# EAGLE board lamp_brd (EAGLE 6.6.0)
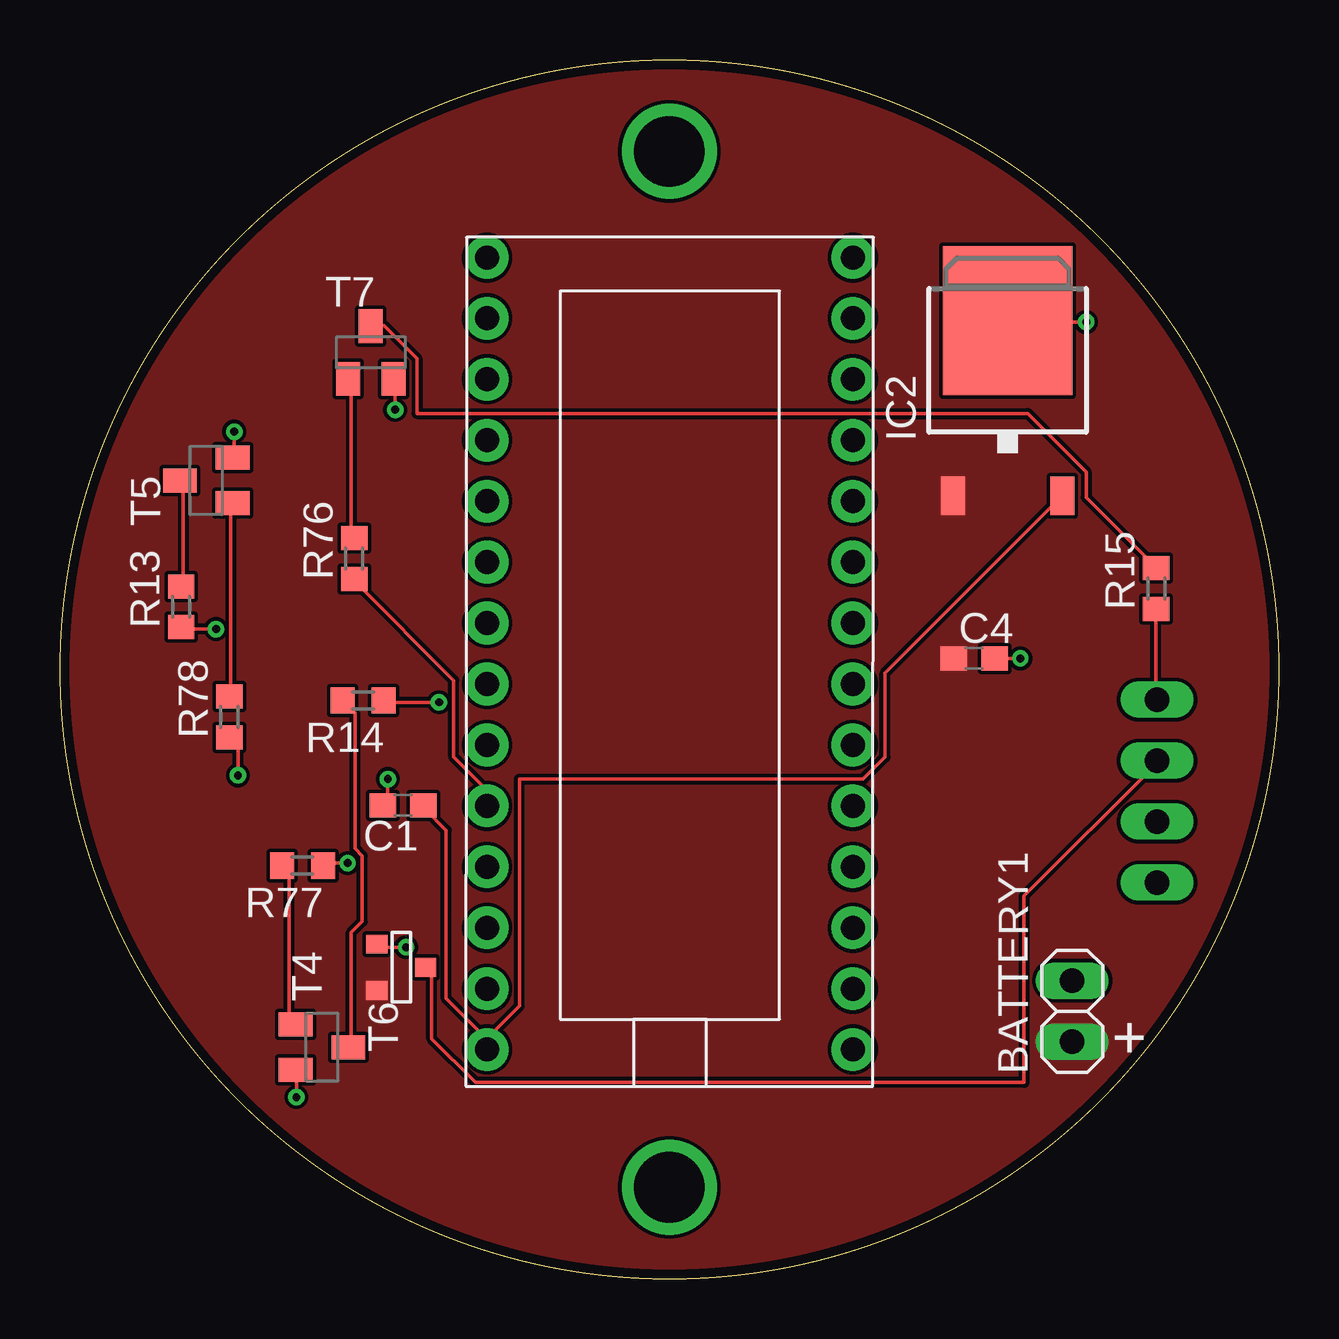
[diagram p0: board, top side]
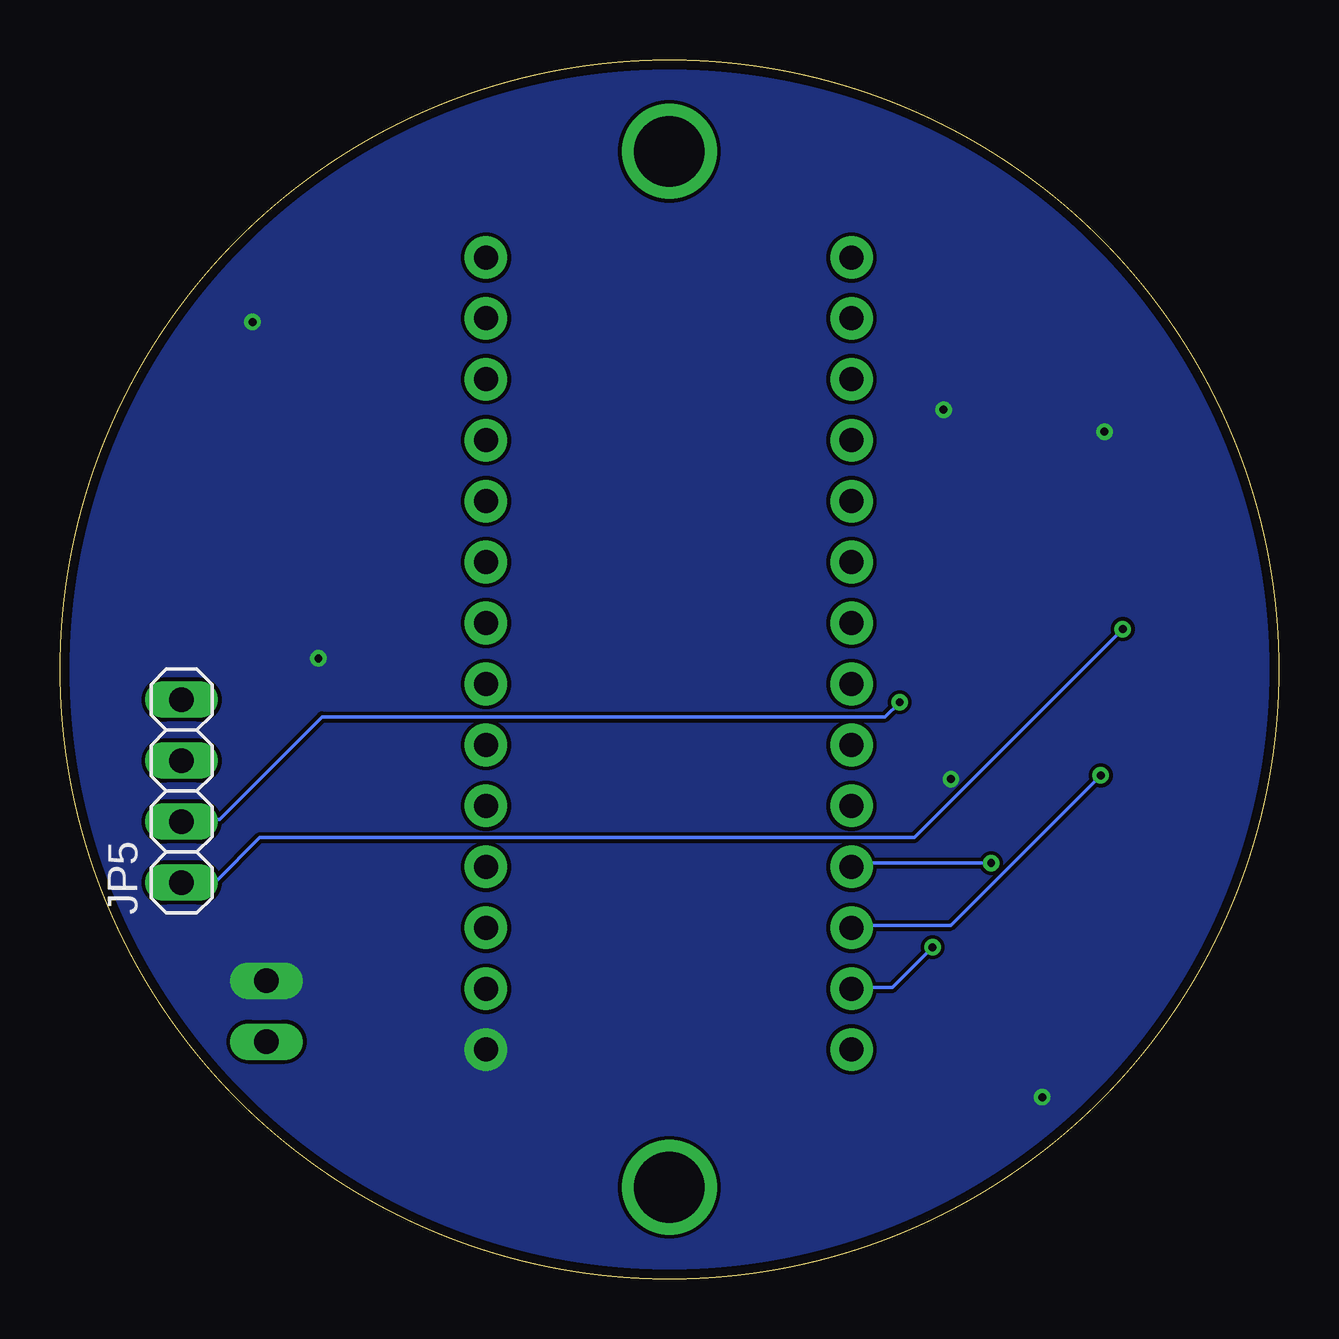
[diagram p1: board, bottom side, seen from below]

Size 50.8 x 50.8 mm. Coordinates in mm from the lower left corner, seen from the top.
Outline: circle at 25.4,25.4 radius 25.4
Copper layers (1*16): Top 0.0356mm / dielectric 1.5011mm / Bottom 0.0356mm
Design rules "LaenPCBOrder": minimum track width 6mil, minimum drill 13mil, track to track 6mil, track to pad 6mil, pad to pad 6mil, via to via 6mil, smd to smd 6mil, copper to edge 15mil, drill to drill 6mil, minimum pad ring 7mil, minimum via ring 7mil, stop-mask expansion 3mil, vias tented up to drill 0mil, thermal gap 10mil

## Footprints (pad centres in the part's own frame; a part is rotated, then mirrored left to right if it is on the bottom)
1X02 = drill 1.016 long: 1 -1.27,0; 2 1.27,0
C0603 = smd 1.1 x 1: 1 -0.85,0; 2 0.85,0
TO252 = smd 1 x 1.6: 1 -2.28,-4.8; 2 2.28,-4.8 | smd 5.4 x 6.2: 3 0,2.5
1X04 = drill 1.016 long: 1 -3.81,0; 2 -1.27,0; 3 1.27,0; 4 3.81,0
R0603 = smd 1 x 1.1: 1 -0.85,0; 2 0.85,0
SOT-23 = smd 0.787 x 0.889: 1 0.025,-1.016; 2 -0.94,1.016; 3 0.991,1.016
SOT23-BEC = smd 1 x 1.4: B -0.95,-1.1; C 0,1.1; E 0.95,-1.1
M2 = drill 1 pad 1.778: AR 0,-17.78; B0 -15.24,-2.54; B1 -15.24,-5.08; B2 -15.24,-7.62; B3 -15.24,-10.16; B4 0,-2.54; B5 0,-5.08; B6 0,-7.62; B7 -15.24,-12.7; C6 0,-10.16; C7 0,-12.7; D0 -15.24,-15.24; D1 -15.24,-17.78; D2 -15.24,-20.32; D3 -15.24,-22.86; D4 -15.24,-25.4; D5 -15.24,-27.94; D6 -15.24,-30.48; D7 -15.24,-33.02; E6 0,-15.24; F0 0,-20.32; F1 0,-22.86; F4 0,-25.4; F5 0,-27.94; F6 0,-30.48; F7 0,-33.02; GND -15.24,0; V+ 0,0

## Placement (x,y rotation side)
BATTERY1  [1X02]  42.19,11.15 90 top
C1  1uF  [C0603]  14.3,19.74 180 top
C4  1uF  [C0603]  38.1,25.86 0 top
IC2  7805DT  [TO252]  39.5,37.44 0 top
JP5  [1X04]  45.73,20.32 90 bottom
R13  390  [R0603]  5.05,28.01 90 top
R14  390  [R0603]  12.63,24.1 180 top
R15  390  [R0603]  45.69,28.77 90 top
R76  390  [R0603]  12.27,30.02 90 top
R77  390  [R0603]  10.11,17.22 180 top
R78  390  [R0603]  7.06,23.42 90 top
T4  [SOT-23]  14.22,12.95 90 top
T5  [SOT23-BEC]  6.1,33.27 90 top
T6  [SOT23-BEC]  10.92,9.65 270 top
T7  [SOT23-BEC]  12.95,38.61 0 top
U$2  M2  [M2]  17.81,9.55 180 top

## Library data of the parts
BATTERY1 JP5 = pinhead
C1 C4 = rcl
IC2 = linear
R13-R15 R76-R78 = resistor
T4 = zetex; OC_FARNELL: unknown; OC_NEWARK: unknown
T5-T7 = transistor-neu-to92
U$2 = M2

## Nets
+5V: C1.1 IC2.2 U$2.V+
+7.4V: BATTERY1.1 C4.1 IC2.1 T4.2
ANODE: JP5.3 T4.1
B4: T4.3 U$2.B4
B5: R78.1 U$2.B5
B6: R77.1 U$2.B6
BLUE: R13.2 T5.C
C6: R76.1 U$2.C6
GND: BATTERY1.2 C1.2 C4.2 IC2.3 T5.E T6.E T7.E U$2.GND
GREEN: R14.2 T6.C
N$13: JP5.4 R15.1
N$14: JP5.2 R14.1
N$15: JP5.1 R13.1
N$76: R76.2 T7.B
N$77: R77.2 T6.B
N$78: R78.2 T5.B
RED: R15.2 T7.C

## Tracks (layer width: path | path; a pad name or v marks a point on that pad's centre or on a via)
+5V
  Top 0.152: 17.78,10.01 16.1,11.68 16.1,18.69 15.19,19.61 C1.1 | 17.78,10.01 17.78,9.55 U$2.V+ 17.78,10.01 | 17.78,10.01 19.15,11.38 19.15,20.83 33.48,20.83 34.39,21.74 34.39,25.25 41.71,32.56 IC2.2
+7.4V
  pour Top (no thermals): -15.24,66.04 66.04,66.04 66.04,-15.24 -15.24,-15.24
ANODE
  Top 0.152: T4.1 15.34,12.9 15.49,12.75 15.49,10.01 17.32,8.18 40.18,8.18 40.18,15.95 45.67,21.44 45.67,21.59 JP5.3
B4  (via drill 0.33)
  Top 0.152: v14.43,13.82 13.21,13.82 T4.3
  Bottom 0.152: v14.43,13.82 16.1,12.14 17.78,12.14 U$2.B4
B5  (via drill 0.33)
  Top 0.152: v7.42,20.98 7.42,22.2 7.11,22.5 R78.1
  Bottom 0.152: v7.42,20.98 13.66,14.73 17.78,14.73 U$2.B5
B6  (via drill 0.33)
  Top 0.152: v11.99,17.32 11.07,17.32 R77.1
  Bottom 0.152: v11.99,17.32 17.63,17.32 17.78,17.17 U$2.B6
BLUE
  Top 0.152: R13.2 5.13,28.9 5.13,33.17 T5.C
C6
  Top 0.152: R76.1 12.29,29.06 16.41,24.94 16.41,21.74 17.78,20.37 17.78,19.76 U$2.C6
GND  (via drill 0.33)
  Top 0.152: v13.66,20.83 13.66,19.91 13.51,19.76 C1.2 | v40.03,25.86 C4.2 | v7.26,35.31 7.26,34.24 T5.E | v9.85,7.57 9.85,8.64 T6.E | v13.97,36.22 13.97,37.44 T7.E | v42.77,39.88 39.57,39.88 IC2.3
  pour Bottom (no thermals): -15.24,66.04 66.04,66.04 66.04,-15.24 -15.24,-15.24
GREEN
  Top 0.152: R14.2 11.84,24.03 12.29,23.57 12.29,17.93 12.6,17.63 12.6,14.88 12.14,14.43 12.14,9.7 T6.C
N$13
  Top 0.152: R15.1 45.67,27.84 45.67,24.18 JP5.4
N$14  (via drill 0.33)
  Top 0.152: v15.8,24.03 13.51,24.03 R14.1
  Bottom 0.152: v15.8,24.03 16.41,23.42 39.88,23.42 44.14,19.15 45.67,19.15 JP5.2
N$15  (via drill 0.33)
  Top 0.152: v6.5,27.08 5.13,27.08 R13.1
  Bottom 0.152: v6.5,27.08 15.19,18.39 42.47,18.39 44.3,16.56 45.67,16.56 JP5.1
N$22  (via drill 2.95)
  other vias: 25.4,46.99
N$23  (via drill 2.95)
  other vias: 25.4,3.81
N$76
  Top 0.152: R76.2 12.14,30.89 12.14,37.44 T7.B
N$77
  Top 0.152: R77.2 9.4,17.17 9.55,17.02 9.55,10.77 9.7,10.62 T6.B
N$78
  Top 0.152: R78.2 7.11,24.33 7.11,32.26 T5.B
RED
  Top 0.152: R15.2 45.67,29.67 42.77,32.56 42.77,33.63 40.34,36.07 14.88,36.07 14.88,38.35 13.51,39.73 13.06,39.73 T7.C

## Text on the board
tPlace: +